# Altium PCB PCB1.PcbDoc
Units mm, origin at the board's own origin, x right, y up, seen from the top; angles counter-clockwise.
Board outline 30 x 30 mm, 2 copper layers (Top Layer, Bottom Layer); 23 components, 13 nets, 57 pads, 0 vias.
Unrouted connection lines stored in the file: 35.
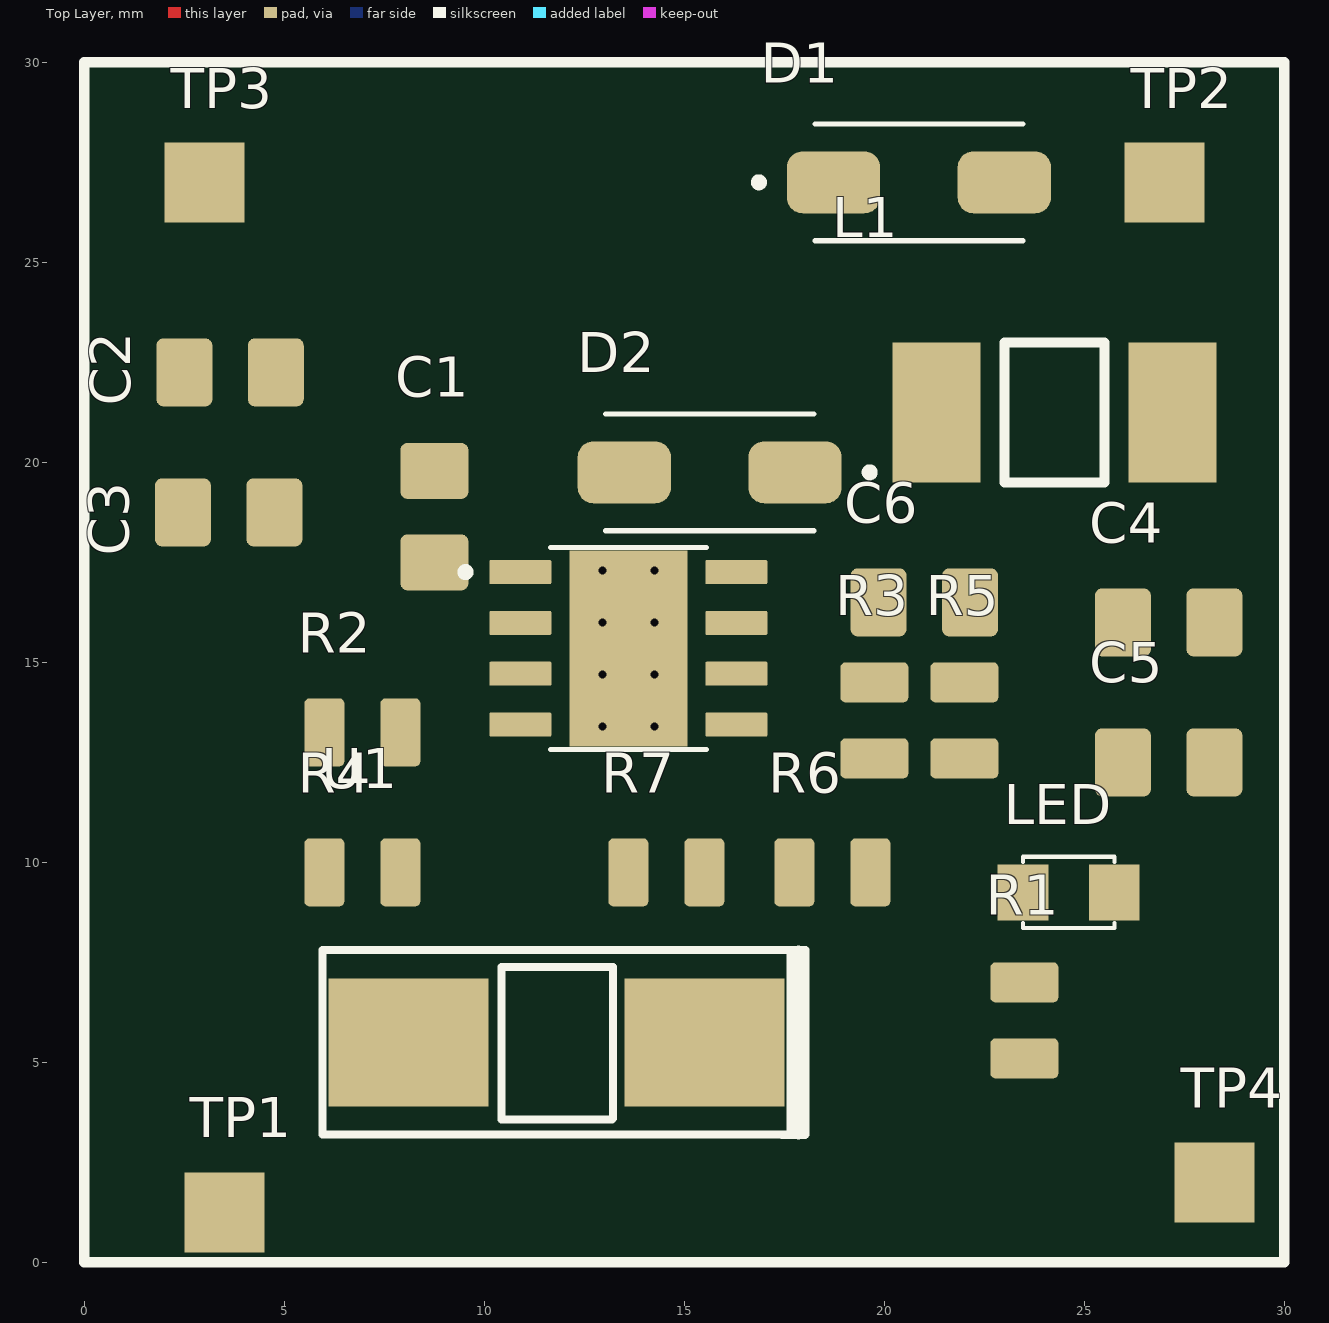
[diagram p0: Top Layer view]
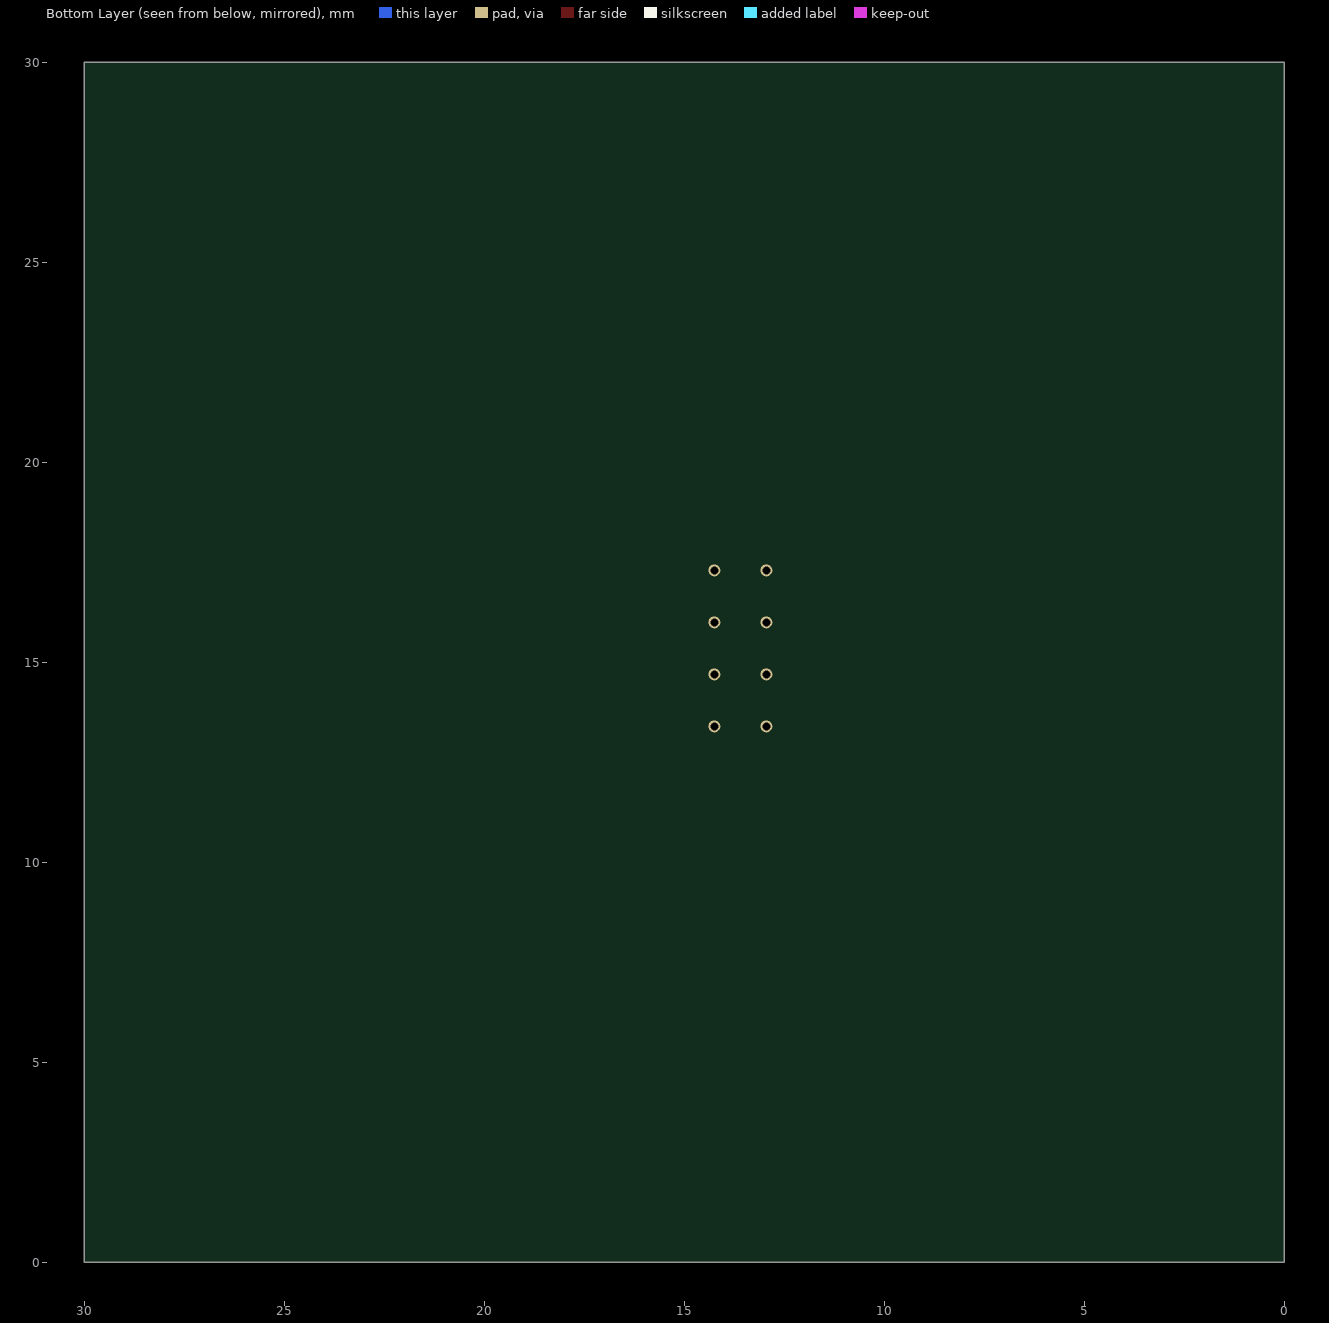
[diagram p1: Bottom Layer view, seen from below]

## Layer stack, top to bottom
Top Solder: solder mask 0.0102, Solder Resist, Dk 3.5
Top Layer: signal copper 0.0356
Dielectric 1: dielectric 0.32, FR-4, Dk 4.8
Bottom Layer: signal copper 0.0356
Bottom Solder: solder mask 0.0102, Solder Resist, Dk 3.5

## Board outline
0,0 30,0 30,30 0,30

## Design rules (kind name [scope] priority, off if disabled: settings)
Clearance [All] p1: gap=0.254 ignorepadtopadclearanceinfootprint=FALSE except(0: Arc-Hole Track-Hole SMDPad-Hole THPad-Hole Via-Hole Fill-Hole Poly-Hole Region-Hole Text-Hole)
PolygonConnect [All] p1: connectstyle=Relief reliefconductorwidth=0.254 reliefentries=4 polygonreliefangle="90 Angle" airgapwidth=0.254
RoomDefinition Sheet1 [InComponentClass('Sheet1')] p1: confinementstyle=ConfineIn formatcopy=TRUE lockcomponents=FALSE outline 31.1,1.723 51.1,1.723 51.1,27.223 31.1,27.223
RoutingVias [All] p1: holewidth=0.711 width=1.27 viastyle="Through Hole" minholewidth=0.711 minwidth=1.27 maxholewidth=0.711 maxwidth=1.27
SolderMaskExpansion [All] p1: expansion=0.102 istentingtop=FALSE
Width [All] p1: maxlimit=0.254 minlimit=0.254 preferedwidth=0.254
30 further rules are at their usual default settings.

## Components (designator, comment, footprint, x,y, rotation, side; value= is the part's Value field where it differs from the comment)
C1 "C0805" CAP_0805 8.75,18.643 r90 top
C2 "C0805" CAP_0805 3.643,22.25 r0 top
C3 "C0805" CAP_0805 3.607,18.75 r0 top
C4 "C0805" CAP_0805 27.107,16 r180 top
C5 "C0805" CAP_0805 27.107,12.5 r180 top
C6 "C0805" CAP_0805 21,16.5 r0 top
D1 "B340A-13" B340A 20.865,27 r0 top
D2 "B340A-13" B340A 15.635,19.75 r180 top
L1 "MWSA0603S" MWSA0603S 24.25,21.25 r0 top
LED "LED_0805_RED" LED-0805-Red 23.464,9.25 r0 top
R1 "R0805" RES_0805 23.5,6.05 r270 top
R2 "R0805" RES_0805 6.95,13.25 r0 top
R3 "R0805" RES_0805 19.75,13.55 r90 top
R4 "R0805" RES_0805 6.95,9.75 r180 top
R5 "R0805" RES_0805 22,13.55 r270 top
R6 "R0805" RES_0805 18.7,9.75 r0 top
R7 "R0805" RES_0805 14.55,9.75 r0 top
TP1 "Pad" PAD_SQ_2MM 3.5,1.25 r90 top
TP2 "Pad" PAD_SQ_2MM 27,27 r0 top
TP3 "Pad" PAD_SQ_2MM 3,27 r0 top
TP4 "Pad" PAD_SQ_2MM 28.25,2 r90 top
U1 "TPS54360" TPS5430DDAR 13.6,15.35 r0 top
? "CAP 477C" "tu tantalum smd7343" 11.8,5.5 r180 top

## Footprints (in the part's own frame and the unit in brackets; to place one, negate y for a bottom-side part, rotate by r counter-clockwise, add the part's x,y. Pads: shape width x height; smd on the part's side, far side on the other; paste and mask are expansions set on the pad)
B340A [mm]
  rrect50% 2.33x1.55 smd: A(2.135,0) C(-2.135,0)
  silkscreen extent -4.1,-1.46 2.6,1.46, body extent -2.6,-1.3 2.6,1.3, height 2.4
CAP_0805 [mm]
  rrect25% 1.4x1.7 smd: 1(-1.143,0) 2(1.143,0)
  body extent -1.15,-0.76 1.15,0.79, height 1.01
LED-0805-Red [mil]
  rect 50x55 smd: 1(0,0) 2(90,0)
  silkscreen extent 0,-35 90,35, body extent 5,-25 85,25, height 43
MWSA0603S [mm]
  rect 2.2x3.5 smd: 1(-2.95,0) 2(2.95,0)
  silkscreen extent -1.25,-1.75 1.25,1.75, body extent -3.6,-3.3 3.6,3.3, height 2.8
PAD_SQ_2MM [mm]
  rect 2x2 smd paste-1: 1(0,0)
RES_0805 [mm]
  rrect25% 1x1.7 smd: 1(-0.95,0) 2(0.95,0)
  body extent -1,-0.63 1,0.63, height 0.47
TPS5430DDAR [mm]
  rrect10% 1.55x0.6 smd mask+0: 1(-2.7,1.905) 2(-2.7,0.635) 3(-2.7,-0.635) 4(-2.7,-1.905) 5(2.7,-1.905) 6(2.7,-0.635) 7(2.7,0.635) 8(2.7,1.905)
  rect 2.95x4.9 smd paste-3 mask+0: 9(0,0)
  round 0.3 hole 0.2 mask+0: 10(-0.65,1.95) 11(0.65,1.95) 12(-0.65,0.65) 13(0.65,0.65) 14(-0.65,-0.65) 15(0.65,-0.65) 16(-0.65,-1.95) 17(0.65,-1.95)
  silkscreen extent -4.17,-2.52 1.95,2.52, body extent -3,-2.45 3,2.45, height 1.7
"tu tantalum smd7343" [mm]
  rect 4x3.2 smd: 1(-3.7,0) 2(3.7,0)
  silkscreen extent -6.23,-2.31 5.85,2.31, body extent -3.75,-2.33 3.85,2.27, height 3.99

## Part data
C1 C2 C3 C4 C5 C6: library part CAP_0805, "Capacitor SMD 0805"
D1 D2: "Diode Schottky 40 V 3A Surface Mount SMA", Package="DO-214 Diodes Inc.", Availability="In Stock", Check_prices=https://www.snapeda.com/parts/B340A-13/Diodes+Inc./view-part/?ref=eda, MF="Diodes Inc.", MP=B340A-13, Price=None, Purchase-URL=https://pricing.snapeda.com/search/part/B340A-13/?ref=eda, SnapEDA_Link=https://www.snapeda.com/parts/B340A-13/Diodes+Inc./view-part/?ref=snap
L1: "Power Inductor SMD Sunlord MWSA0603S", Manufacturer=Sunlord, Manufacturer Part Number=MWSA0603S-
R1 R2 R3 R4 R5 R6 R7: library part RES_0805, "Resistor SMD 0805"
TP1 TP2 TP3 TP4: library part PAD_SQ_2MM, "Test Point Square 2mm"
?: "Tụ tantalum 7343 477C 16V 470uF 7.3x4.3mm"

## Nets (pads, with @x,y where several pads share a name; then routed paths per layer and width w, separated by ;. In a path a pad name is that pad's centre, name@x,y a point inside that pad or via, vN(x,y) a via of type N, cw(c..) or ccw(c..) an arc to the next point about the centre after c; other vN are vias at no path point)
GND: ?.2 C2.1 C3.1 C4.1 C5.1 C6.1 D2.A LED.2 R4.1 R7.1 TP3.1 TP4.1 U1.7 U1.9
Net_1: ?.1 C4.2 C5.2 L1.2 R1.2 R6.2 TP1.1
NetC1_1: C1.1 U1.1
NetC1_1: C2.2 C3.2 D1.C U1.2
NetC1_2: C1.2 D2.C L1.1 U1.8
NetC6_2: C6.2 R5.1
NetD1_A: D1.A TP2.1
NetLED_1: LED.1 R1.1
NetR2_1: R2.1 R4.2
NetR2_2: R2.2 U1.4
NetR3_1: R3.1 R5.2
NetR3_2: R3.2 U1.6
NetR6_1: R6.1 R7.2 U1.5
pads on no net: U1.3 U1.10 U1.11 U1.12 U1.13 U1.14 U1.15 U1.16 U1.17

## Silkscreen, mask and mechanical layers (free items; w line width, h text height)
Top Overlay:
  the board outline again, w0.254